# EAGLE board stereo_jack (EAGLE 5.07)
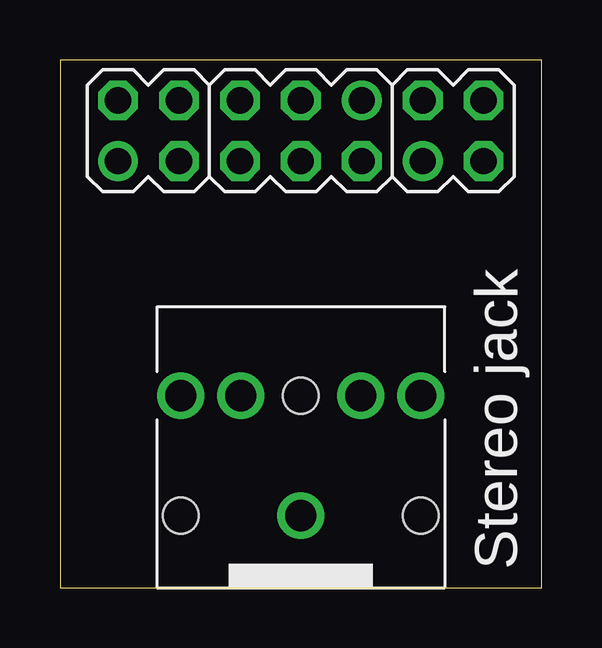
[diagram p0: board, top side]
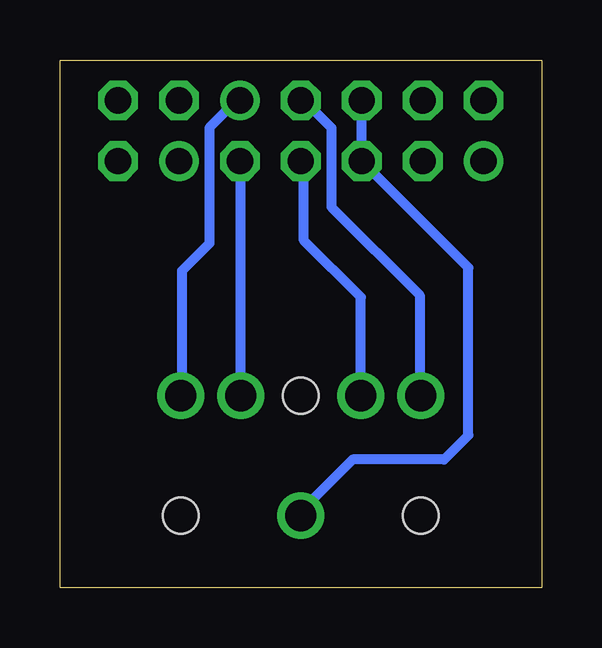
[diagram p1: board, bottom side, seen from below]

Size 20.07 x 22 mm. Coordinates in mm from the lower left corner, seen from the top.
Outline: 0,0 20.07,0 20.07,22 0,22 0,0
Copper layers (1*16): Top 0.035mm / dielectric 1.5mm / Bottom 0.035mm
Design rules "8mils": minimum track width 8mil, minimum drill 0.6mm, track to track 8mil, track to pad 8mil, pad to pad 8mil, via to via 8mil, smd to smd 0mil, copper to edge 20mil, drill to drill 10mil, minimum pad ring 8mil, minimum via ring 8mil, stop-mask expansion 0mil, vias tented up to drill 0mil, thermal gap 10mil

## Footprints (pad centres in the part's own frame; a part is rotated, then mirrored left to right if it is on the bottom)
MA03-2 = drill 1.1 round: 1 -2.54,-1.27 | drill 1.1 octagon: 2 -2.54,1.27; 3 0,-1.27; 4 0,1.27; 5 2.54,-1.27; 6 2.54,1.27
ADAM_TECH_ASJ-7 = drill 1.3 round: RING -5,8; RING_BYPASS -2.5,8; SLEEVE 0,3; TIP 5,8; TIP_BYPASS 2.5,8 | hole 1.5: 0,8; 5,3; -5,3
MA02-2 = drill 1.1 round: 1 -1.27,-1.27 | drill 1.1 octagon: 2 -1.27,1.27; 3 1.27,-1.27; 4 1.27,1.27

## Placement (x,y rotation side)
SV1  [MA03-2]  10.03,19.05 180 top
U$1  ADAM_TECH_ASJ-7  [ADAM_TECH_ASJ-7]  10.03,0 0 top
U$2  MA02-2  [MA02-2]  3.68,19.05 0 top
U$3  MA02-2  [MA02-2]  16.38,19.05 0 top

## Library data of the parts
SV1 U$1-U$3 = joakim

## Nets
N$1: SV1.1 U$1.TIP
N$2: SV1.2 U$1.TIP_BYPASS
N$3: SV1.3 U$1.RING
N$4: SV1.4 U$1.RING_BYPASS
N$5: SV1.5 SV1.6 U$1.SLEEVE

## Tracks (layer width: path | path; a pad name or v marks a point on that pad's centre or on a via)
N$1
  Bottom 0.406: SV1.1 12.7,20.32 13.84,19.18 13.84,14.35 14.99,13.21 14.99,8.05 U$1.TIP
N$2
  Bottom 0.406: U$1.TIP_BYPASS 12.53,17.74 SV1.2
N$3
  Bottom 0.406: SV1.3 9.91,20.32 8.76,19.18 8.76,15.88 5.08,12.19 5.08,8.05 U$1.RING
N$4
  Bottom 0.406: U$1.RING_BYPASS 7.53,12.11 9.91,14.48 9.91,17.65 SV1.4
N$5
  Bottom 0.406: U$1.SLEEVE 10.03,3.17 7.87,5.33 4.06,5.33 3.05,6.35 3.05,13.34 SV1.6 SV1.5

## Text on the board
tPlace: Stereo jack